# Altium PCB Systems Level Tester.PcbDoc
Units mil, origin at the board's own origin, x right, y up, seen from the top; angles counter-clockwise.
Board outline 4300 x 3505 mil, 2 copper layers (Top Layer, Bottom Layer); 38 components, 56 nets, 249 pads, 18 vias.
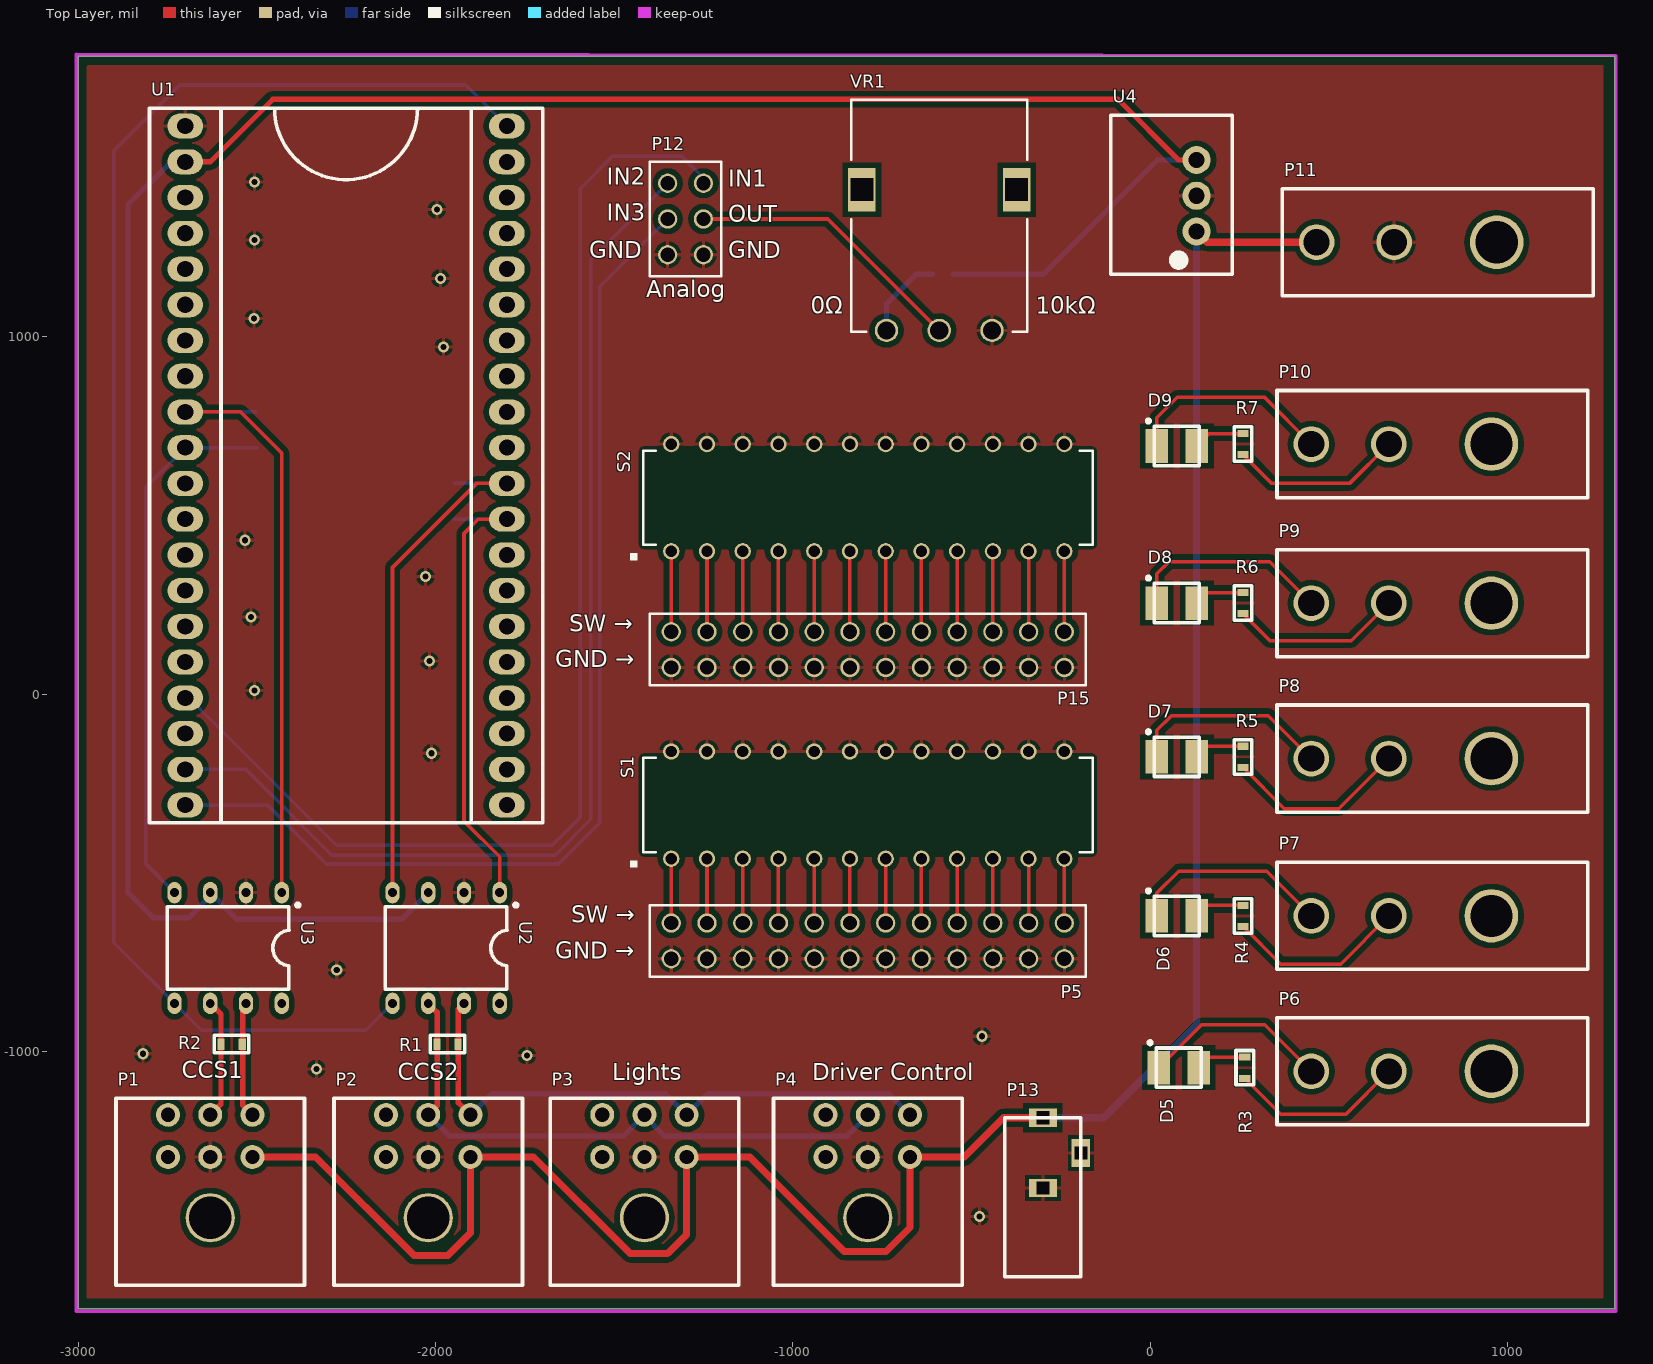
[diagram p0: Top Layer view]
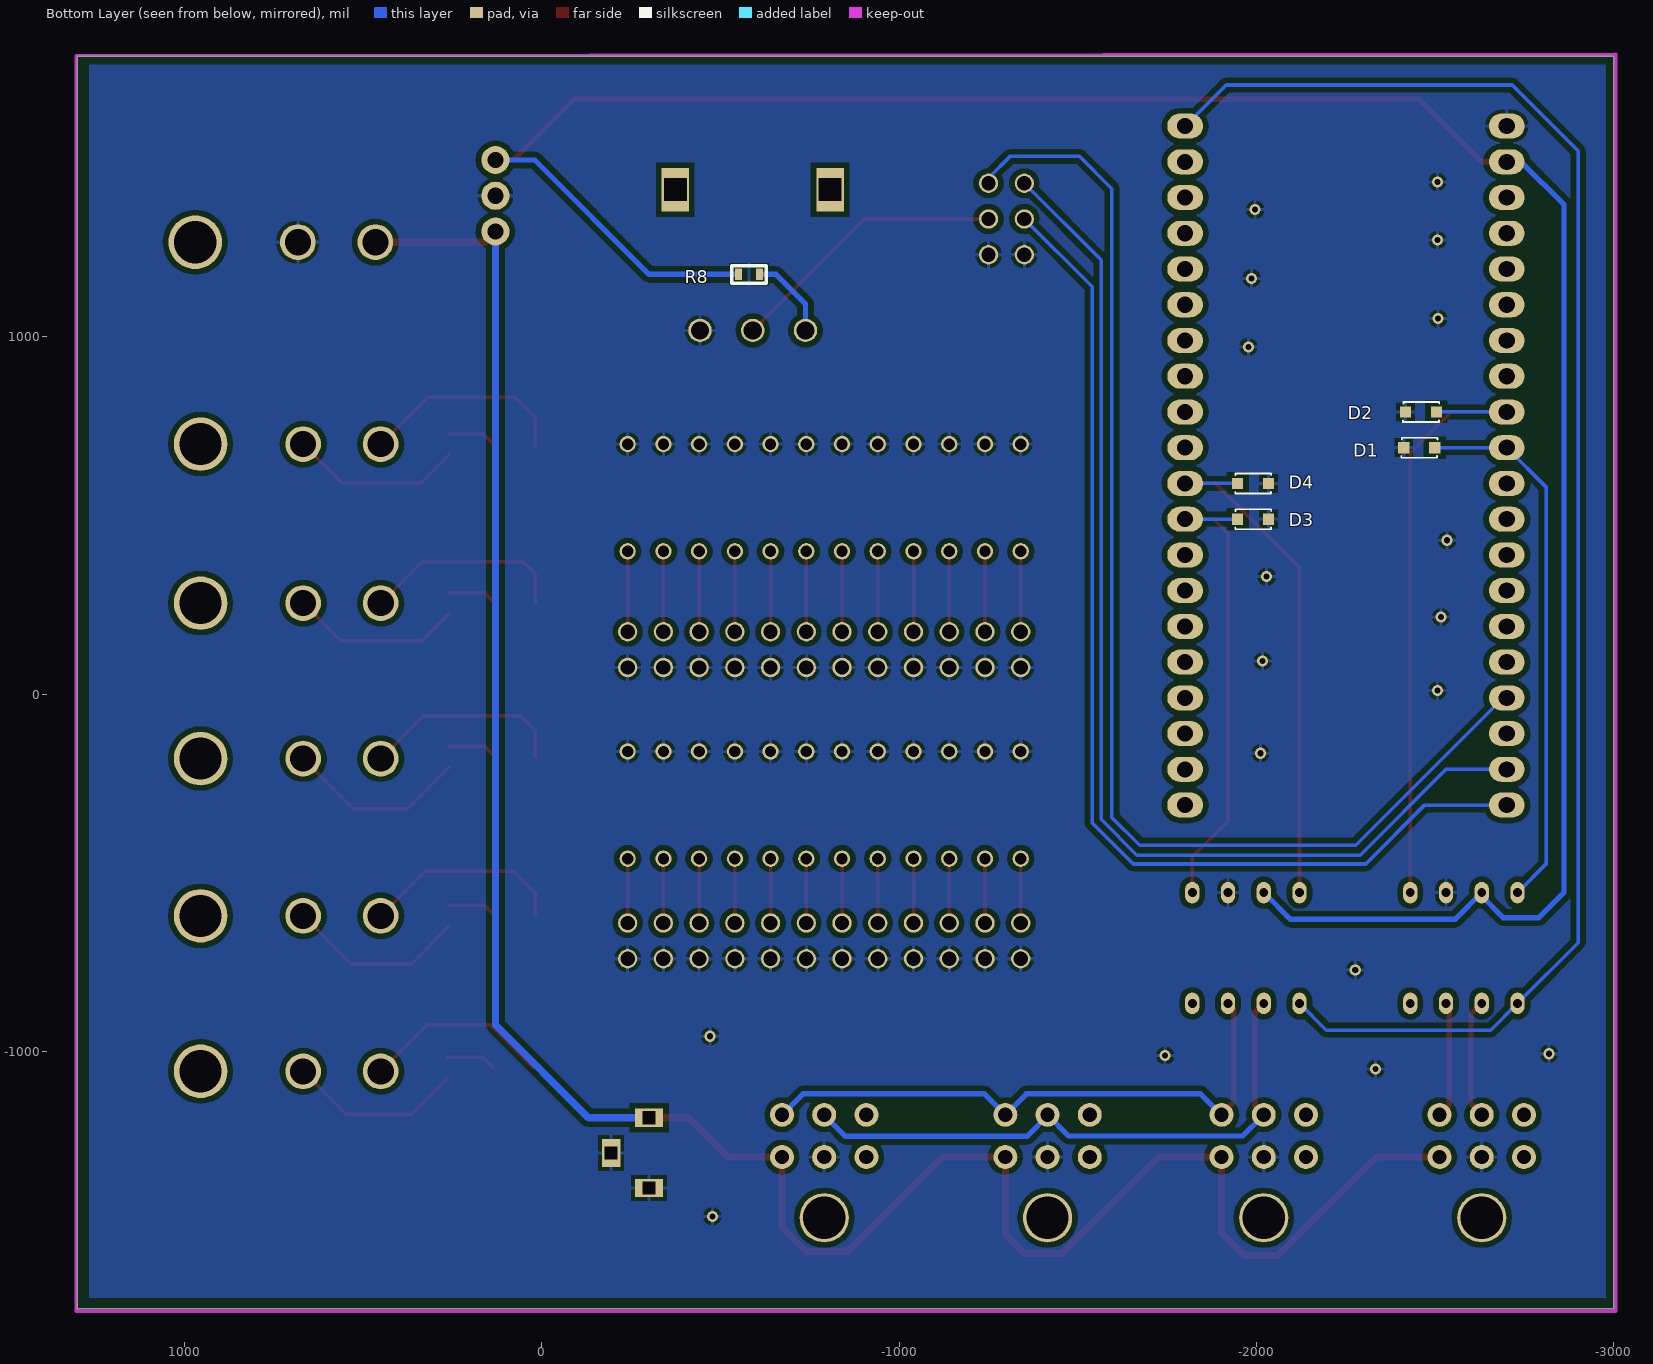
[diagram p1: Bottom Layer view, seen from below]
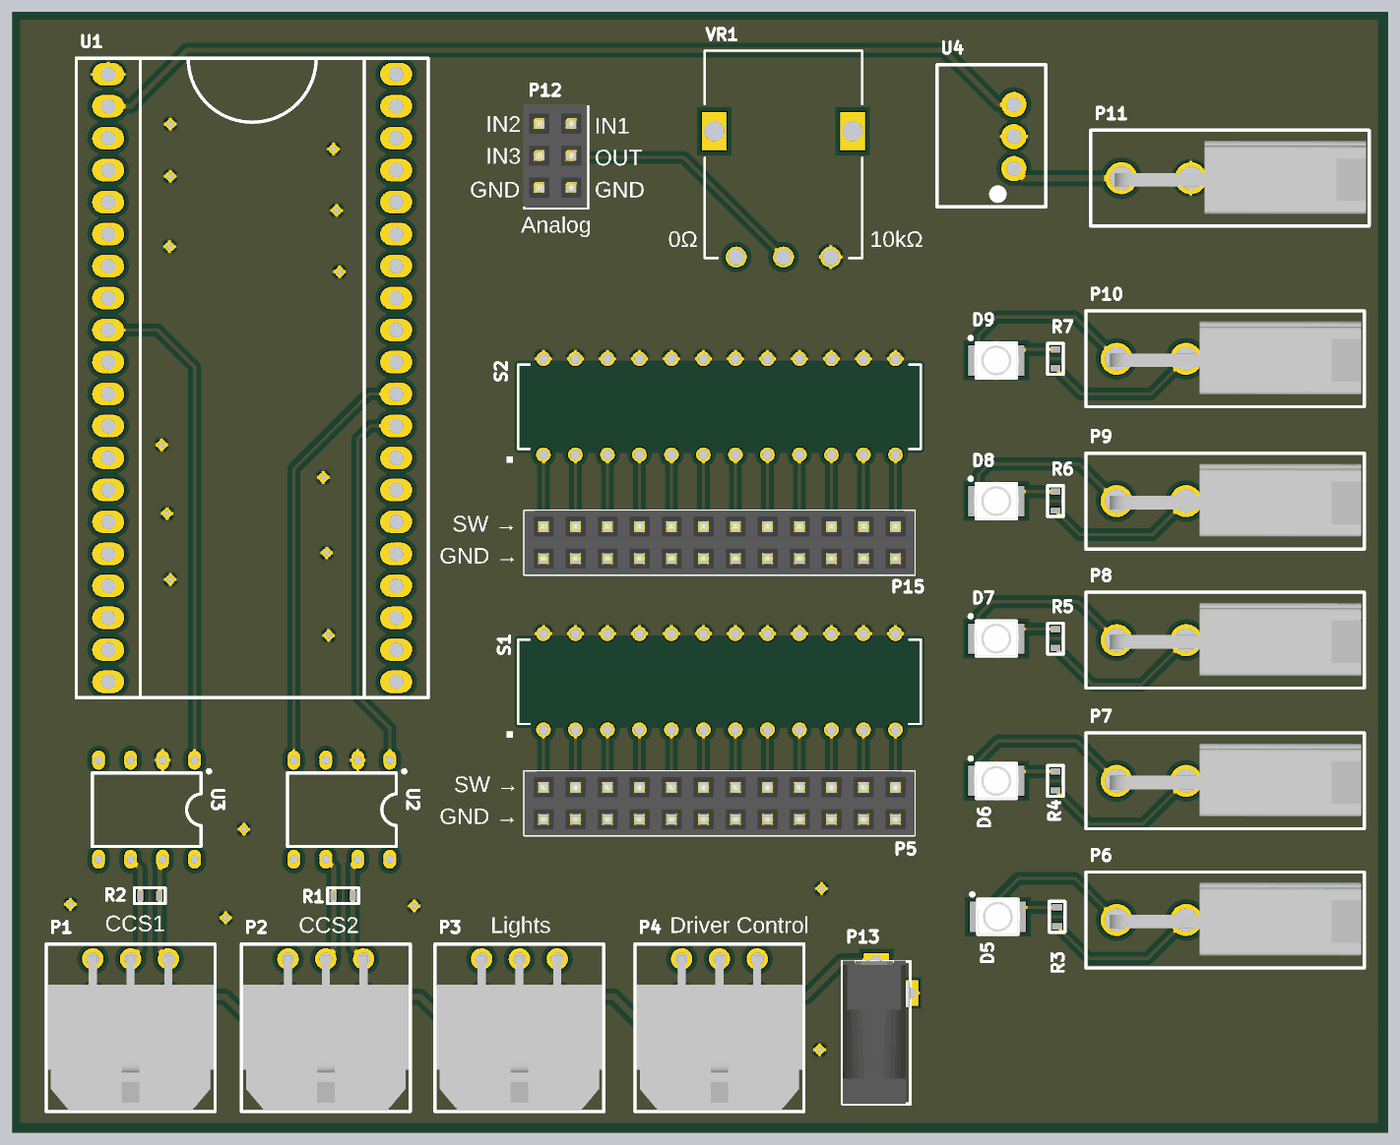
[diagram p2: 3D render of the assembled board from above, using the file's embedded part models]
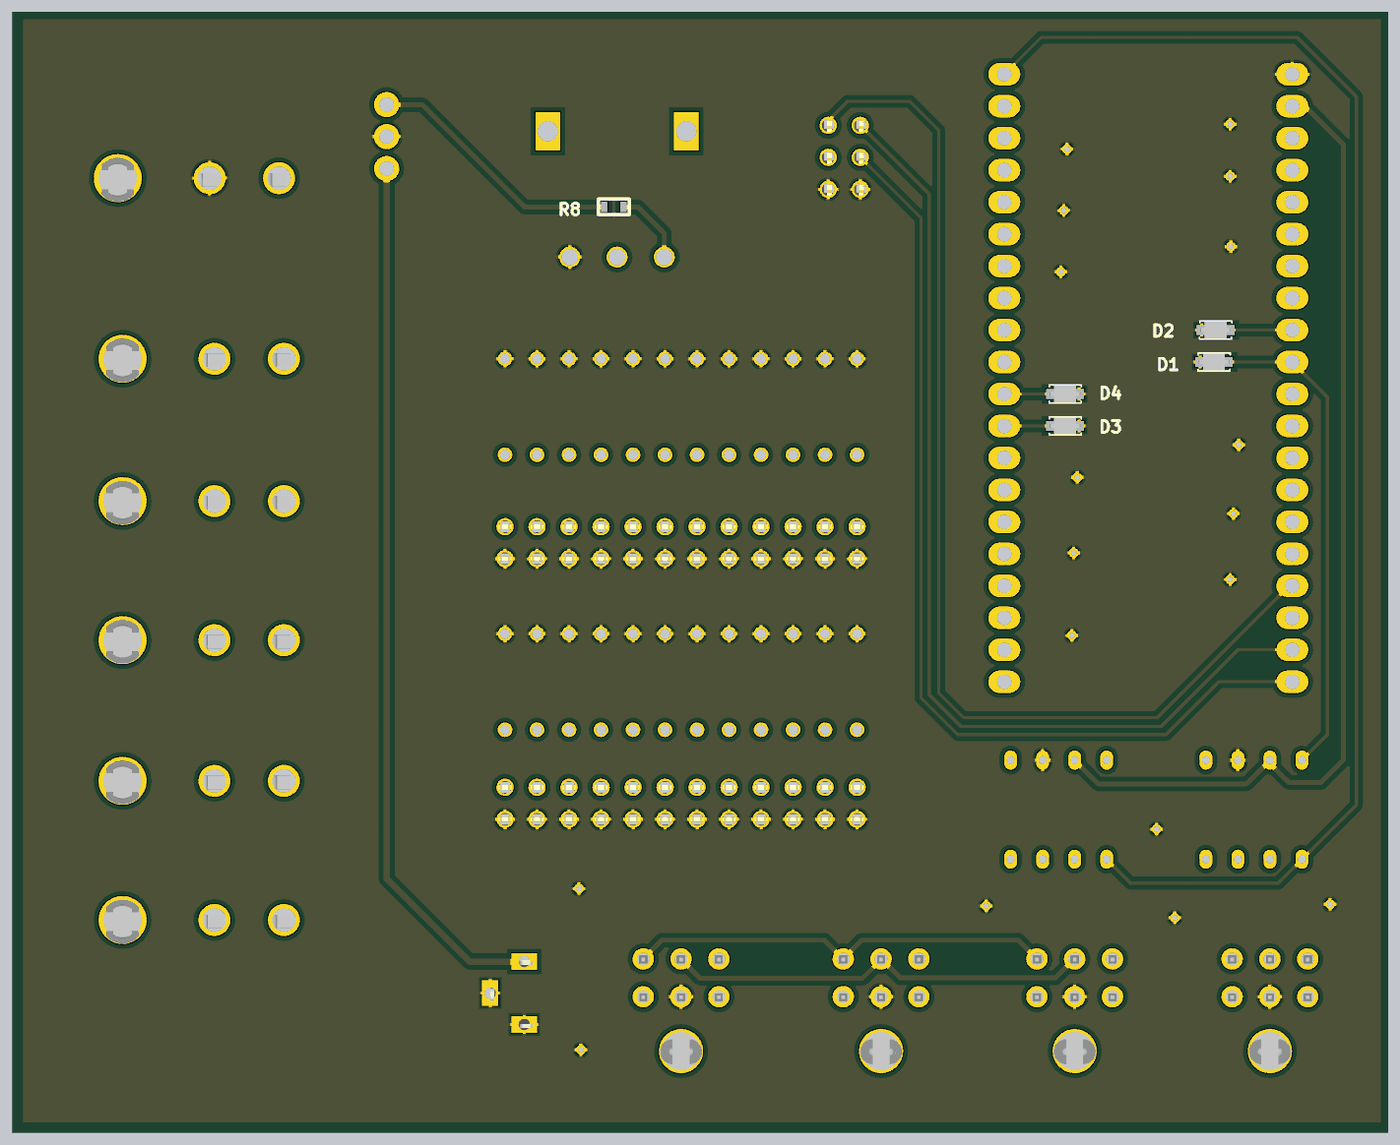
[diagram p3: 3D render of the assembled board from below, using the file's embedded part models]

## Layer stack, top to bottom
Top Solder: solder mask 0.4, Solder Resist, Dk 3.5
Top Layer: signal copper 1.4
Dielectric 1: dielectric 12.6, FR-4, Dk 4.8
Bottom Layer: signal copper 1.4
Bottom Solder: solder mask 0.4, Solder Resist, Dk 3.5

## Board outline
-3000,-1720 1300,-1720 1300,1785 -3000,1785

## Design rules (kind name [scope] priority, off if disabled: settings)
BoardOutlineClearance [All] p1: gap=15
Clearance [All] p1: gap=15
DiffPairsRouting [All] p1: maxlimit=10 minlimit=10 mostfreqgap=10 toplayer_minwidth=15 toplayer_maxwidth=15 toplayer_prefwidth=15 bottomlayer_minwidth=15 bottomlayer_maxwidth=15 bottomlayer_prefwidth=15 maxuncoupledlength=500
HoleSize [All] p1: absolutevalues=TRUE maxlimit=100 minlimit=13 maxpercent=80.000 minpercent=20.000
MinimumAnnularRing [All] p1: minimumring=7
PolygonConnect [All] p1: connectstyle=Relief reliefconductorwidth=10 reliefentries=4 polygonreliefangle="90 Angle" airgapwidth=10
RoutingVias [All] p1: holewidth=17 width=30 viastyle="Through Hole" minholewidth=13 minwidth=27 maxholewidth=28 maxwidth=50
SolderMaskExpansion [All] p1: expansion=4
Width Width_2 [InNet('5V')] p1: maxlimit=15 minlimit=15 preferedwidth=15
Width Width_1 [InNet('12V')] p2: maxlimit=20 minlimit=20 preferedwidth=20
Width [All] p3: maxlimit=20 minlimit=7 preferedwidth=10
28 further rules are at their usual default settings.

## Classes and differential pairs
component class Switches: R8 S1 S2 VR1
component class Power: P11 P13 U4
component class MCU: D1 D2 D3 D4 R1 R2 U1 U2 U3
component class Connectors: D5 D6 D7 D8 D9 P1 P2 P3 P4 P5 P6 P7 P8 P9 P10 P12 P15 R3 R4 R5 R6 R7
differential pair CAN2: +CAN2_P -CAN2_N
differential pair CAN1: +CAN1_P -CAN1_N

## Components (designator, comment, footprint, x,y, rotation, side; value= is the part's Value field where it differs from the comment)
D1 "TVS Diode" "TVS Diode" -2455,690 r270 bottom
D2 "TVS Diode" "TVS Diode" -2460,790 r270 bottom
D3 "TVS Diode" "TVS Diode" -1990,490 r270 bottom
D4 "TVS Diode" "TVS Diode" -1990,590 r270 bottom
D5 "LED RED" "RED LED" 80,-1045 r270 top
D6 "LED RED" "RED LED" 75,-620 r270 top
D7 "LED RED" "RED LED" 75,-175 r270 top
D8 "LED RED" "RED LED" 75,255 r270 top
D9 "LED RED" "RED LED" 75,695 r270 top
P1 "CCS1" PCB_MLX_MICROFIT_3X2 -2630,-1465 r0 top
P2 "CCS2" PCB_MLX_MICROFIT_3X2 -2020,-1465 r0 top
P3 "LIGHTS" PCB_MLX_MICROFIT_3X2 -1415,-1465 r0 top
P4 "Driver Control" PCB_MLX_MICROFIT_3X2 -790,-1465 r0 top
P5 "24-Pin Vertical Header" "24-Pin Vertical Header" -740,-690 r90 top
P6 "Molex Mini-Fit 1x2" "Molex Mini-Fit Jr 2x1" 955,-1055 r90 top
P7 "Molex Mini-Fit 1x2" "Molex Mini-Fit Jr 2x1" 955,-620 r90 top
P8 "Molex Mini-Fit 1x2" "Molex Mini-Fit Jr 2x1" 955,-180 r90 top
P9 "Molex Mini-Fit 1x2" "Molex Mini-Fit Jr 2x1" 955,255 r90 top
P10 "Molex Mini-Fit 1x2" "Molex Mini-Fit Jr 2x1" 955,700 r90 top
P11 "Lights Board Power" "Molex Mini-Fit Jr 2x1" 970,1265 r90 top
P12 "6-Pin Vertical Header" "6-Pin Vertical Header" -1300,1330 r180 top
P13 "Board Power" "BARREL JACK PJ007" -300,-1185 r90 top
P15 "24-Pin Vertical Header" "24-Pin Vertical Header" -740,125 r90 top
R1 "120" PCB_GENERIC_SMD_0603 -1966,-979 r180 top
R2 "120" PCB_GENERIC_SMD_0603 -2570,-979 r180 top
R3 "SCH_GENERIC_RESISTOR_0603" PCB_GENERIC_SMD_0603 265,-1045 r90 top
R4 "SCH_GENERIC_RESISTOR_0603" PCB_GENERIC_SMD_0603 260,-620 r90 top
R5 "SCH_GENERIC_RESISTOR_0603" PCB_GENERIC_SMD_0603 260,-175 r90 top
R6 "SCH_GENERIC_RESISTOR_0603" PCB_GENERIC_SMD_0603 260,255 r270 top
R7 "SCH_GENERIC_RESISTOR_0603" PCB_GENERIC_SMD_0603 260,700 r90 top
R8 "SCH_GENERIC_RESISTOR_0603" PCB_GENERIC_SMD_0603 -580,1175 r0 bottom
S1 "12-position DIP Switch" "12-Position DIP Switch" -790,-310 r0 top
S2 "12-position DIP Switch" "12-Position DIP Switch" -790,550 r0 top
U1 "LPC1768 mbed" "LPC 1768 mbed Layout" -2250,640 r0 top
U2 "MCP2562" MCP2562 -1970,-710 r270 top
U3 "MCP2562" MCP2562 -2580,-710 r270 top
U4 "R78E-1.0 DC/DC" R78-1.0 130,1395 r90 top
VR1 "10k*" "Rotary Pot" -590,1215 r0 top

## Footprints (in the part's own frame and the unit in brackets; to place one, negate y for a bottom-side part, rotate by r counter-clockwise, add the part's x,y. Pads: shape width x height; smd on the part's side, far side on the other; paste and mask are expansions set on the pad)
"6-Pin Vertical Header" [mil]
  round 54 hole 40: 1(-50,100) 2(-50,0) 3(-50,-100) 4(50,-100) 5(50,0) 6(50,100)
  silkscreen extent -100,-160 100,160, body extent -100,-160 100,160, height 338
"12-Position DIP Switch" [mm]
  round 1.16 hole 0.8: 1(-13.97,-3.81) 2(-11.43,-3.81) 3(-8.89,-3.81) 4(-6.35,-3.81) 5(-3.81,-3.81) 6(-1.27,-3.81) 7(1.27,-3.81) 8(3.81,-3.81) 9(6.35,-3.81) 10(8.89,-3.81) 11(11.43,-3.81) 12(13.97,-3.81) 13(13.97,3.81) 14(11.43,3.81) 15(8.89,3.81) 16(6.35,3.81) 17(3.81,3.81) 18(1.27,3.81) 19(-1.27,3.81) 20(-3.81,3.81) 21(-6.35,3.81) 22(-8.89,3.81) 23(-11.43,3.81) 24(-13.97,3.81)
  silkscreen extent -16.89,-4.45 15.98,3.35, body extent -15.9,-3.28 15.9,3.28, height 3.81
"24-Pin Vertical Header" [mil]
  round 54 hole 40: 1(-50,600) 2(-50,500) 3(-50,400) 4(-50,300) 5(-50,200) 6(-50,100) 7(-50,0) 8(-50,-100) 9(-50,-200) 10(-50,-300) 11(-50,-400) 12(-50,-500) 13(50,-500) 14(50,-400) 15(50,-300) 16(50,-200) 17(50,-100) 18(50,0) 19(50,100) 20(50,200) 21(50,300) 22(50,400) 23(50,500) 24(50,600)
  silkscreen extent -100,-560 100,660, body extent -100,-560 100,660, height 338
"BARREL JACK PJ007" [mm] "Pin connections for Barrel Jack"
  rect 1.3x2 hole 0.9 square: 1(0,0) 2(-5,0)
  rect 2x1.3 hole 0.9 square: 3(-2.5,-2.7)
  silkscreen extent -11.3,-2.7 0,2.7, body extent -11.31,-2.68 0.14,2.67, height 7.4
"LPC 1768 mbed Layout" [mil]
  oval 100x70 hole 45: 1(-450,950) 2(-450,850) 3(-450,750) 4(-450,650) 5(-450,550) 6(-450,450) 7(-450,350) 8(-450,250) 9(-450,150) 10(-450,50) 11(-450,-50) 12(-450,-150) 13(-450,-250) 14(-450,-350) 15(-450,-450) 16(-450,-550) 17(-450,-650) 18(-450,-750) 19(-450,-850) 20(-450,-950) 21(450,-950) 22(450,-850) 23(450,-750) 24(450,-650) 25(450,-550) 26(450,-450) 27(450,-350) 28(450,-250) 29(450,-150) 30(450,-50) 31(450,50) 32(450,150) 33(450,250) 34(450,350) 35(450,450) 36(450,550) 37(450,650) 38(450,750) 39(450,850) 40(450,950)
  silkscreen extent -550,-1000 550,1000, body extent -545,-990 545,1000, height 260
MCP2562 [mil]
  oval 60x40 hole 25: 1(-155,150) 2(-155,50) 3(-155,-50) 4(-155,-150) 5(155,-150) 6(155,-50) 7(155,50) 8(155,150)
  silkscreen extent -125,-170 115,200, body extent -115,-170 115,170, height 210
"Molex Mini-Fit Jr 2x1" [mil]
  round 100 hole 73: 1(0,287) 2(0,504)
  round 150 hole 118: ""(0,0)
  silkscreen extent -150,-270 150,600, body extent -111,-260 117,525, height 449
PCB_GENERIC_SMD_0603 [mm]
  rect 0.5x0.8 smd: 1(-0.75,0) 2(0.75,0)
  silkscreen extent -1.22,-0.63 1.22,0.63, body extent -0.75,-0.5 0.75,0.5, height 0.45
PCB_MLX_MICROFIT_3X2 [mm]
  round 1.7 hole 1.02: 1(3,4.32) 2(0,4.32) 3(-3,4.32) 4(3,7.32) 5(0,7.32) 6(-3,7.32)
  round 3.5 hole 3: ""(0,0)
  silkscreen extent -6.7,-4.8 6.7,8.5, body extent -6.57,-4.65 6.58,7.59, height 8.83
R78-1.0 [mm]
  round 2 hole 1.15: 1(-2.54,0) 2(0,0) 3(2.54,0)
  silkscreen extent -5.59,-2.54 5.71,6.1, body extent -4.44,-1.59 4.45,5.4, height 10.4
"RED LED" [mm]
  rect 2.4x1.6 smd: 1(0,-1.425) 2(0,1.425)
  silkscreen extent -1.9,-2.16 1.4,1.6, body extent -1.4,-1.75 1.4,1.75, height 1.88
"Rotary Pot" [mm]
  round 1.66 hole 1.3: 1(-3.75,-5) 2(0,-5) 3(3.75,-5)
  rect 1.96x3.06 hole 1.6 square unplated: NC(-5.5,5) NC(5.5,5)
  silkscreen extent -6.25,-5.08 6.25,11.4
"TVS Diode" [mm]
  rect 0.8x0.8 smd: 1(0,1.1) 2(0,-1.1)
  silkscreen extent -0.71,-1.27 0.71,1.3, body extent -0.65,-1.27 0.65,1.27, height 1.04

## Part data
P1 P2 P3 P4: library part SCH_MLX_MICROFIT_3X2
P11: library part "Molex Mini-Fit 1x2"
P13: library part Component_1
R1 R2: library part SCH_GENERIC_RESISTOR_0603, "120 Ohms"
R3 R4 R5 R6 R7 R8: "Generic SMD resistor 0603"
U4: library part R78E-1.0
VR1: library part "Rotary Pot"

## Via types
v1: diameter 31, hole 17, Top Layer to Bottom Layer, 18 vias

## Nets (pads, with @x,y where several pads share a name; then routed paths per layer and width w, separated by ;. In a path a pad name is that pad's centre, name@x,y a point inside that pad or via, vN(x,y) a via of type N, cw(c..) or ccw(c..) an arc to the next point about the centre after c; other vN are vias at no path point)
3.3V: U1.40 U2.5 U3.5 | length 4351.8
  Bottom Layer w10: U2.5 -2195,-940 -2655,-940 U3.5 -2900,-695 -2900,1520 -2715,1705 -1915,1705 U1.40
5V: R8.2 U1.2 U2.3 U3.3 U4.3 | length 6921.6
  Top Layer w15: U1.2 -2630,1490 -2455,1665 -90,1665 80,1495 U4.3
  Bottom Layer w15: U1.2@-2735,1490 U1.2 -2740,1490 -2860,1370 -2860,-555 -2790,-625 -2690,-625 -2630,-565 U3.3 -2555,-630 -2095,-630 U2.3 ; R8.2 -300,1175 20,1495 U4.3
12V: P1.1 P2.1 P3.1 P4.1 P11.2 P13.1 U4.1 | length 6400.5
  Top Layer w20: P1.1 -2335.08,-1294.92 -2060,-1570 -1965,-1570 -1901.89,-1506.89 P2.1 -1725.08,-1294.92 -1455,-1565 -1350,-1565 -1296.89,-1511.89 P3.1 -1120.08,-1294.92 -856.1,-1558.9 -738.9,-1558.9 -671.89,-1491.89 P4.1 -519.92,-1294.92 -410,-1185 P13.1 ; U4.1 160,1265 P11.2
  Bottom Layer w20: P13.1 -130,-1185 130,-925 U4.1
"ANALOG IN1": P12.3 U1.17 | length 3489.7
  Bottom Layer w10: U1.17 -2690,-10 -2277.68,-422.32 -1672.68,-422.32 -1595,-344.64 -1595,1415 -1505,1505 -1310,1505 -1250,1445 P12.3
"ANALOG IN2": P12.4 U1.19 | length 3144.9
  Bottom Layer w10: U1.19 -2530,-210 -2290,-450 -1665,-450 -1565,-350 -1565,1215 P12.4
"ANALOG IN3": P12.5 U1.20 | length 3044.9
  Bottom Layer w10: U1.20 -2470,-310 -2305,-475 -1654.64,-475 -1540,-360.36 -1540,1140 P12.5
"ANALOG OUT": P12.2 VR1.2 | length 789.2
  Top Layer w10: P12.2 -901.85,1330 VR1.2
BRAKES: D5.2 R3.2 | length 141.1
  Top Layer w10: D5.2 165.63,-1015.47 R3.2
CAN1_N: P1.5 R2.2 U3.6 | length 336.7
  Top Layer w15: P1.5 -2600,-1146.81 -2600,-895 U3.6
CAN1_P: P1.4 R2.1 U3.7 | length 326.8
  Top Layer w15: U3.7 -2539,-874 -2539,-1149.7 P1.4
CAN2_N: P2.5 P3.5 P4.5 R1.2 U2.6 | length 1660.4
  Top Layer w15: P2.5 -1995,-1151.81 -1995,-890 U2.6
  Bottom Layer w15: P2.5 -1960.81,-1236 -1474.19,-1236 -1416.19,-1178 -1357.19,-1237 -850.19,-1237 P4.5
CAN2_P: P2.4 P3.4 P4.4 R1.1 U2.7 | length 1660
  Top Layer w15: U2.7 -1936,-881 -1936,-1142.7 P2.4
  Bottom Layer w15: P2.4 -1843.08,-1118 -1355.7,-1118 P3.4 -1238.08,-1118 -730.7,-1118 P4.4
GND: D1.2 D2.2 D3.1 D4.1 P1.2 P2.2 P3.2 P4.2 P5.1 P5.2 P5.3 P5.4 P5.5 P5.6 P5.7 P5.8 P5.9 P5.10 P5.11 P5.12 P11.1 P12.1 P12.6 P13.2 P13.3 P15.1 P15.2 P15.3 P15.4 P15.5 P15.6 P15.7 P15.8 P15.9 P15.10 P15.11 P15.12 S1.13 S1.14 S1.15 S1.16 S1.17 S1.18 S1.19 S1.20 S1.21 S1.22 S1.23 S1.24 S2.13 S2.14 S2.15 S2.16 S2.17 S2.18 S2.19 S2.20 S2.21 S2.22 S2.23 S2.24 U1.1 U2.2 U3.2 U4.2 VR1.3
  other v1: -477,-1461 -2333,-1048 -1744,-1011 -2818,-1006 -471,-957 -2276,-771 -2011,-165 -2506,10 -2017,93 -2516,216 -2028,329 -2533,431 -1977,972 -2508,1051 -1986,1164 -2506,1271 -1996,1356 -2506,1434
"HEADLIGHTS (HIGH)": D8.2 R6.1 | length 141.1
  Top Layer w10: D8.2 160.63,284.53 R6.1
"HEADLIGHTS (LOW)": D9.2 R7.2 | length 143.2
  Top Layer w10: D9.2 165.63,729.53 R7.2
"LEFT SIGNAL": D6.2 R4.2 | length 141.1
  Top Layer w10: D6.2 160.63,-590.47 R4.2
NetD1_1: D1.1 U1.10 U3.4 | length 1525.4
  Bottom Layer w10: U3.4 -2810,-475 -2810,580 U1.10 D1.1
NetD2_1: D2.1 U1.9 U3.1 | length 1744.3
  Top Layer w10: U1.9 -2545,790 -2430,675 U3.1
  Bottom Layer w10: U1.9 D2.1
NetD3_2: D3.2 U1.29 U2.1 | length 1329.7
  Top Layer w10: U2.1 -1820,-455 -1920,-355 -1920,450 -1880,490 U1.29
  Bottom Layer w10: D3.2 U1.29
NetD4_2: D4.2 U1.30 U2.4 | length 1474
  Top Layer w10: U2.4 -2120,355 -1885,590 U1.30
  Bottom Layer w10: D4.2 U1.30
NetD5_1: D5.1 P6.2 | length 530.7
  Top Layer w10: D5.1 143.9,-925 321,-925 P6.2
NetD6_1: D6.1 P7.2 | length 573.1
  Top Layer w10: D6.1 18.9,-556.1 80,-495 326,-495 P7.2
NetD7_1: D7.1 P8.2 | length 572.7
  Top Layer w10: D7.1 18.9,-101.1 60,-60 331,-60 P8.2
NetD8_1: D8.1 P9.2 | length 576.2
  Top Layer w10: D8.1 18.9,336.9 53,371 335,371 P9.2
NetD9_1: D9.1 P10.2 | length 588.9
  Top Layer w10: D9.1 18.9,773.9 76,831 320,831 P10.2
NetP6_1: P6.1 R3.1 | length 494.3
  Top Layer w10: R3.1 365.47,-1175 548,-1175 P6.1
NetP7_1: P7.1 R4.1 | length 507.6
  Top Layer w10: R4.1 365.47,-755 533,-755 P7.1
NetP8_1: P8.1 R5.1 | length 513.8
  Top Layer w10: R5.1 375.47,-320 528,-320 P8.1
NetP9_1: P9.1 R6.2 | length 482.8
  Top Layer w10: R6.2 335.47,150 563,150 P9.1
NetP10_1: P10.1 R7.1 | length 486.9
  Top Layer w10: R7.1 340.47,590 558,590 P10.1
NetR8_1: R8.1 VR1.1 | length 236.6
  Bottom Layer w15: VR1.1 -737.64,1092.36 -655,1175 R8.1
"RIGHT SIGNAL": D7.2 R5.2 | length 141.1
  Top Layer w10: D7.2 160.63,-145.47 R5.2
SW1: P5.24 S1.1 | length 180
  Top Layer w10: P5.24 S1.1
SW2: P5.23 S1.2 | length 180
  Top Layer w10: P5.23 S1.2
SW3: P5.22 S1.3 | length 180
  Top Layer w10: P5.22 S1.3
SW4: P5.21 S1.4 | length 180
  Top Layer w10: P5.21 S1.4
SW5: P5.20 S1.5 | length 180
  Top Layer w10: P5.20 S1.5
SW6: P5.19 S1.6 | length 180
  Top Layer w10: P5.19 S1.6
SW7: P5.18 S1.7 | length 180
  Top Layer w10: P5.18 S1.7
SW8: P5.17 S1.8 | length 180
  Top Layer w10: P5.17 S1.8
SW9: P5.16 S1.9 | length 180
  Top Layer w10: P5.16 S1.9
SW10: P5.15 S1.10 | length 180
  Top Layer w10: P5.15 S1.10
SW11: P5.14 S1.11 | length 180
  Top Layer w10: P5.14 S1.11
SW12: P5.13 S1.12 | length 180
  Top Layer w10: P5.13 S1.12
SW13: P15.24 S2.1 | length 225
  Top Layer w10: P15.24 S2.1
SW14: P15.23 S2.2 | length 225
  Top Layer w10: P15.23 S2.2
SW15: P15.22 S2.3 | length 225
  Top Layer w10: P15.22 S2.3
SW16: P15.21 S2.4 | length 225
  Top Layer w10: P15.21 S2.4
SW17: P15.20 S2.5 | length 225
  Top Layer w10: P15.20 S2.5
SW18: P15.19 S2.6 | length 225
  Top Layer w10: P15.19 S2.6
SW19: P15.18 S2.7 | length 225
  Top Layer w10: P15.18 S2.7
SW20: P15.17 S2.8 | length 225
  Top Layer w10: P15.17 S2.8
SW21: P15.16 S2.9 | length 225
  Top Layer w10: P15.16 S2.9
SW22: P15.15 S2.10 | length 225
  Top Layer w10: P15.15 S2.10
SW23: P15.14 S2.11 | length 225
  Top Layer w10: P15.14 S2.11
SW24: P15.13 S2.12 | length 225
  Top Layer w10: P15.13 S2.12
pads on no net: P1. P1.3 P1.6 P2. P2.3 P2.6 P3. P3.3 P3.6 P4. P4.3 P4.6 P6. P7. P8. P9. P10. P11. U1.3 U1.4 U1.5 U1.6 U1.7 U1.8 U1.11 U1.12 U1.13 U1.14 U1.15 U1.16 U1.18 U1.21 U1.22 U1.23 U1.24 U1.25 U1.26 U1.27 U1.28 U1.31 U1.32 U1.33 U1.34 U1.35 U1.36 U1.37 U1.38 U1.39 U2.8 U3.8 VR1.NC

## Polygon pours and split planes (outlines as drawn)
GND on Top Layer "GND_top" (solid, remove dead copper, pour order 0): -2973,1760 1268,1760 1268,-1692 1266,-1690 -2975,-1690 -2975,1760 -2977,1762
GND on Bottom Layer "GND_bottom" (solid, remove dead copper, pour order 2): -2975,1762 1266,1762 1266,-1690 1264,-1688 -2977,-1688 -2977,1762 -2979,1764

## Keep-outs
Keep-Out Layer:
  lines w10: -3005,-1726 1303,-1726 1303,1787 -3005,1791 -3005,-1726

## Silkscreen, mask and mechanical layers (free items; w line width, h text height)
Top Overlay:
  text "IN2" at -1520,1410 h80
  text "IN1" at -1180,1405 h80
  text "IN3" at -1520,1310 h80
  text "OUT" at -1180,1305 h80
  text "GND" at -1570,1205 h80
  text "GND" at -1180,1205 h80
  text "Analog" at -1410,1095 h80
  text "0Ω" at -950,1050 h80
  text "10kΩ" at -320,1050 h80
  text "SW →" at -1625,160 h80
  text "GND →" at -1665,60 h80
  text "SW →" at -1620,-655 h80
  text "GND →" at -1665,-755 h80
  text "CCS1" at -2710,-1090 h80
  text "CCS2" at -2105,-1095 h80
  text "Lights" at -1505,-1095 h80
  text "Driver Control" at -945,-1095 h80